# Altium PCB balance_car.PcbDoc (part 4 of 4)
Units mil, origin at the board's own origin, x right, y up, seen from the top; angles counter-clockwise.
Board outline 5041 x 1892 mil, 2 copper layers (Top Layer, Bottom Layer); 151 components, 112 nets, 599 pads, 108 vias.
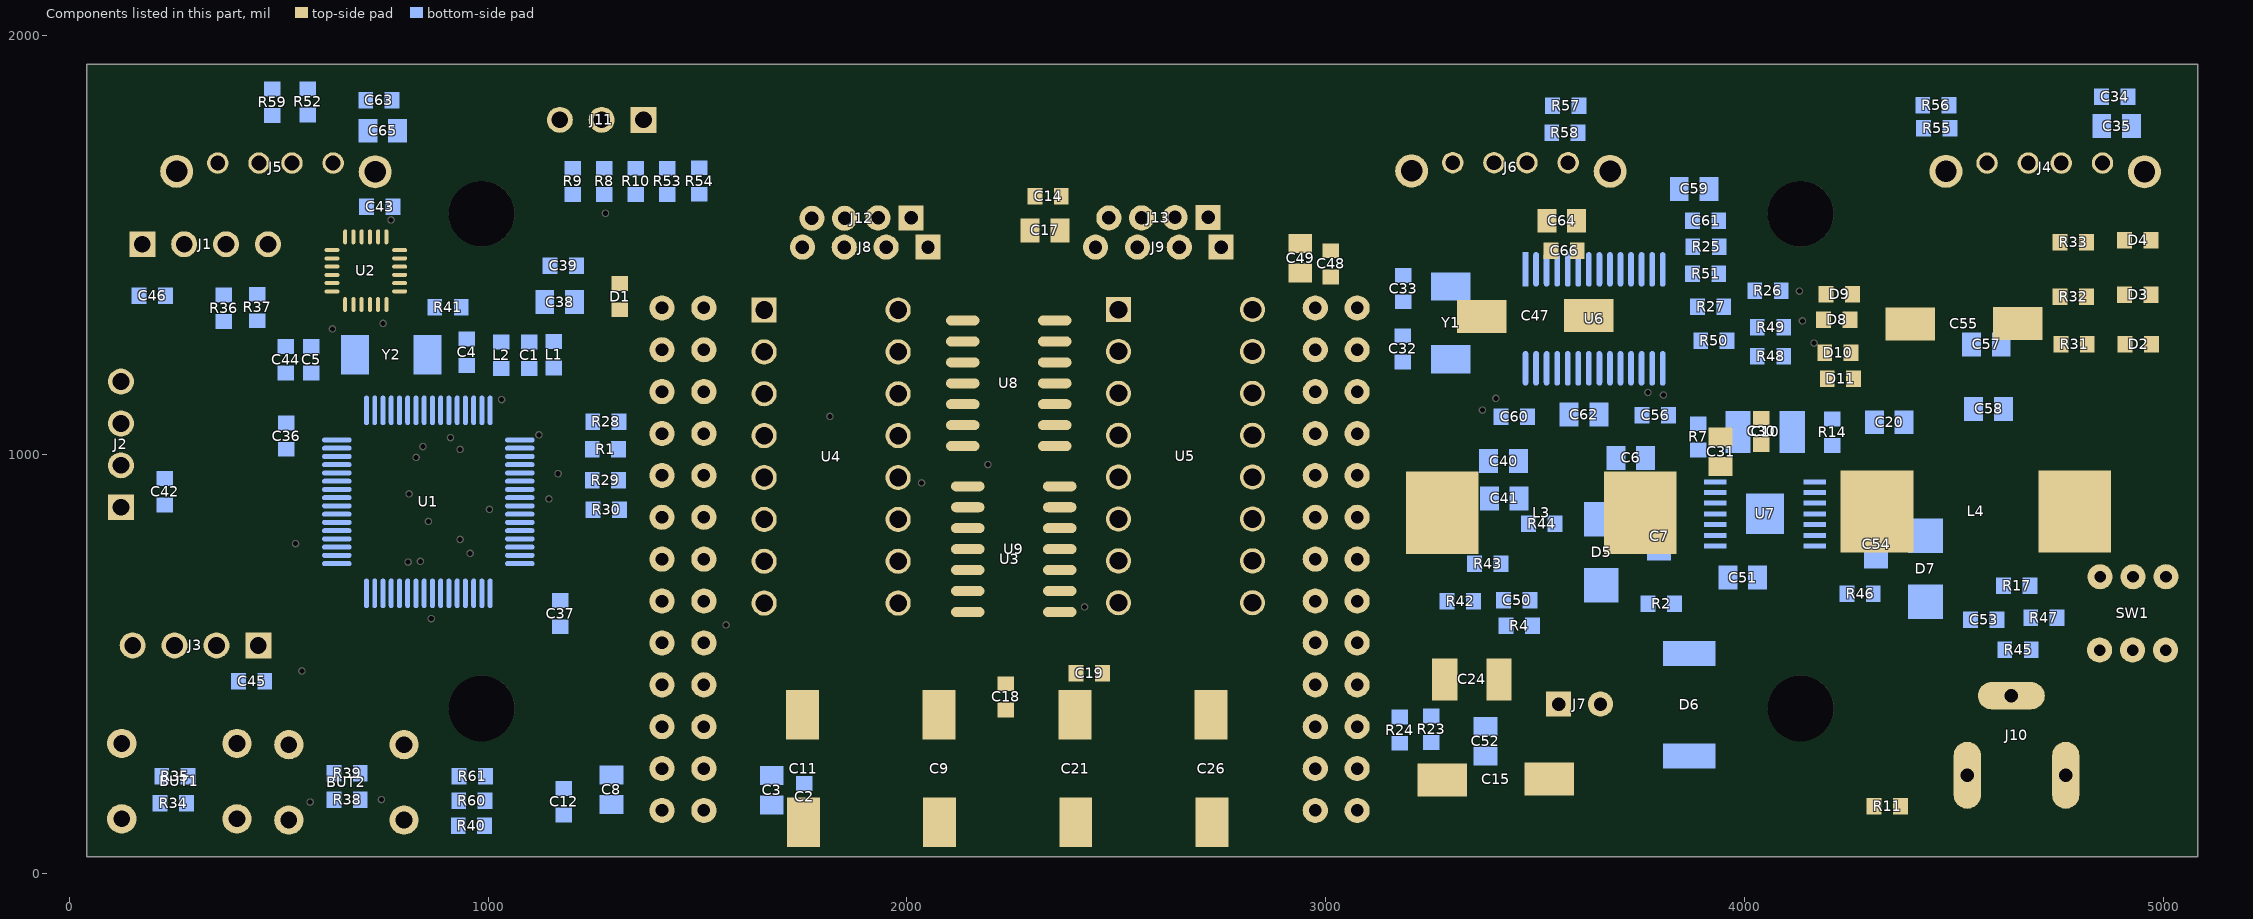
[diagram p4: the components of this part, seen from the top]

## Via types
v1: diameter 26, hole 20, Top Layer to Bottom Layer, tented both sides, 108 vias

## Nets (pads, with @x,y where several pads share a name; then routed paths per layer and width w, separated by ;. In a path a pad name is that pad's centre, name@x,y a point inside that pad or via, vN(x,y) a via of type N, cw(c..) or ccw(c..) an arc to the next point about the centre after c; other vN are vias at no path point) (continued)
pads on no net: U1.2 U1.3 U1.4 U1.8 U1.9 U1.10 U1.11 U1.20 U1.24 U1.25 U1.26 U1.27 U1.33 U1.34 U1.35 U1.36 U1.37 U1.38 U1.39 U1.50 U1.52 U1.53 U1.54 U1.55 U1.56 U1.57 U1.58 U1.59 U2.2 U2.3 U2.4 U2.5 U2.6 U2.7 U2.14 U2.15 U2.16 U2.17 U2.19 U2.21 U2.22 U3.1 U3.2 U3.3 U3.4 U3.5 U3.6 U3.7 U3.8 U3.9 U3.10 U3.11 U3.12 U3.14 U3.15 U3.16 U3.17 U3.18 U3.19 U3.20 U3.21 U3.22 U3.23 U3.27 U3.28 U3.30 U3.33 U3.34 U3.35 U3.40 U3.41 U3.43 U3.44 U3.46 U3.47 U3.48 U6.25 U6.27 U8.10 U8.11 U8.12 U8.13 U9.10 U9.11 U9.12 U9.13

## Polygon pours and split planes (outlines as drawn)
GND on Top Layer "Bottom Layer-No Net" (solid, pour order 1000): 4654,186.55 4698,226.84 4698,1408 2592,1408 2577,1394.27 1546,1394.27 1458,1313.69 1488,1286.22 1488,172.82 1585,84 1595,84 4634,84 4639,88.58 4678,124.29 4678,204.86 4678,213.1
GND on Top Layer "Bottom Layer-No Net" (solid, pour order 1001): 115,74 1444,74 1473,103 1361,215 1361,1681 110,1681 37,1608 90,1555 90,113 90,99 105,84
GND on Bottom Layer "Bottom Layer-No Net" (solid, pour order 1002): 4585,1377.06 4746,1233.83 4746,1006.98 4746,150.29 4727,133.39 4649,64 1551,64 1551,1389.51 1571,1407.31 1610,1442 4624,1442 4624,1416.2 4712,1337.92 4702,1329.02 4702,1285.43

## Keep-outs
Keep-Out Layer:
  lines w5: 40,99 40,1870 ; 40,101 ccw(c100.3,101) 101.32,40.71 ; 40.71,1869.68 cw(c101,1870.7) 101,1931 ; 98,1931 5020,1931 ; 99,40 5022,40 ; 5019.68,1930.29 cw(c5020.7,1870) 5081,1870 ; 5020.71,40.68 ccw(c5020.71,100.98) 5081,102 ; 5081,101 5081,1874

## Other copper
Top Layer:
  rectangle net GND: 3517,1202 3638,1396
  rectangle net NetC20_1: 4338,783 4464,975
  rectangle net VCC: 4653,709 4798,1089
  rectangle net VCC12V: 1693,283 2828,402
  rectangle net NetC6_2: 3642,720 3854,971
  rectangle net VCC3V3: 3153,687 3403,1005
  rectangle net GND: 1681,79 2799,170
Bottom Layer:
  rectangle net GND: 4667,356 4795,570
  rectangle net NetD6_1: 3840,186 3980,299
  rectangle net VCC3V3: 647,617 716,695
  rectangle net VCC3V3: 1035,657 1124,742
  rectangle net VCC3V3: 585,1035 711,1145
  rectangle net VCC3V3: 3163,716 3242,929

## Silkscreen, mask and mechanical layers (free items; w line width, h text height)
Top Overlay:
  circle w5: c4133.89,1579 r137.8
  circle w5: c4134.89,397 r137.8
  circle w5: c982.89,393 r137.8
  circle w5: c984.89,1575 r137.8
  rectangle: 1185,1560 1227,1625
  rectangle: 1145,1667 1187,1727
  rectangle: 5021,781 5057,838
  rectangle: 5023,883 5056,918
  lines w5: 1146,1549 1146,1612 ; 1146,1650 1146,1713 ; 1185,1648 1185,1711 ; 1187,1549 1187,1612 ; 1225,1549 1225,1612 ; 1225,1650 1225,1713 ; 4863,1224 5030,1224 ; 4863,1225 4863,1583 ; 4864,1584 5031,1584 ; 4885,972 5052,972 ; 4885,974 4885,1193 ; 4885,1194 5052,1194 ; 4936,1209 4944.5,1217.5 ; 4945,1200 4945,1218 4954.5,1208.5 ; 5006,783 5023,783 ; 5009,885 5022,885 ; 5022,886 5022,919 5056,919 5056,885 5071,885 ; 5023,784 5023,839 ; 5024,839 5057,839 5057,783 5073,783 ; 5030,1225 5030,1583 ; 5052,974 5052,1193 ; 5093,1226 5101.5,1217.5
  text "Two_Wheel" at 1269,1667 h40
  text "WRTnode.CarV2.2" at 1665,1650 h80
  text "Multiple_" at 1274,1577 h40
  text "I2C" at 50,1565 h60
  text "Wheel" at 1278,1506 h40
  text "G" at 246,1390 h40
  text "SCK" at 311,1390 h40
  text "SDA" at 435,1389 h40
  text "V" at 162,1385 h40
  text "R" at 210,1156 h40
  text "3.3V" at 4895,1144 h40
  text "5V" at 4899,1068 h40
  text "T" at 209,1055 h40
  text "12V" at 4900,996 h40
  text "G" at 207,950 h40
  text "ON" at 4900,881 h40
  text "V" at 209,842 h40
  text "OFF" at 4884,784 h40
  text "UART" at 73,740 h40
  text "SWD" at 247,620 h60
  text "V" at 443,426 h40
  text "CLK" at 302,424 h40
  text "DTA" at 91,422 h40
  text "G" at 238,421 h40
  text "RST" at 212,349 h40
  text "BOOT0" at 566,347 h40
Bottom Overlay:
  lines w5: 961,1158 961,1172 1138,1089 ; 962,1172 976,1172 ; 1104,1148 1104,1162 ; 1118,1162 1104,1162 ; 1143,1135 1104,1162 ; 3709.5,577.5 3737,605 3737,594 ; 3725,605 3736,605

## Text inside footprints (layer, text, board x,y; h text height)
C9: Top Overlay "+" at 2191,409 h45 r270
C11: Top Overlay "+" at 1866,409 h45 r270
C15: Top Overlay "+" at 3565,110 h45 r180
C21: Top Overlay "+" at 2516,409 h45 r270
C26: Top Overlay "+" at 2841,409 h45 r270
C47: Top Overlay "+" at 3341,1445 h45
C55: Top Overlay "+" at 4683,1198 h45 r180